# Allegro board CHIP_PRO_v1_0.brd
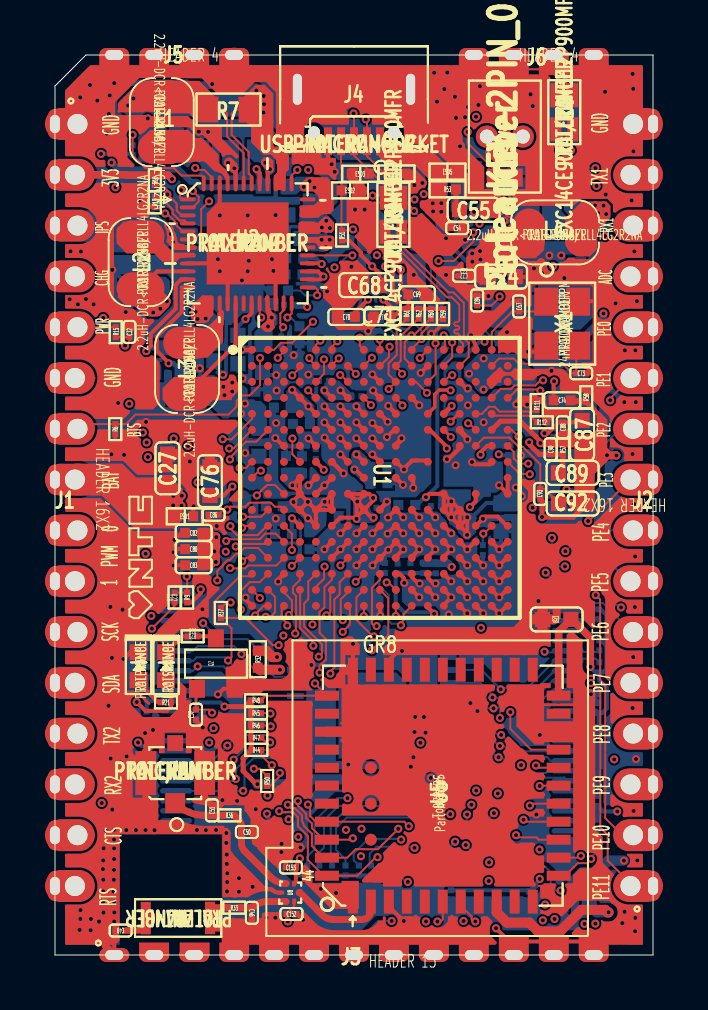
[diagram p0: board, top side]
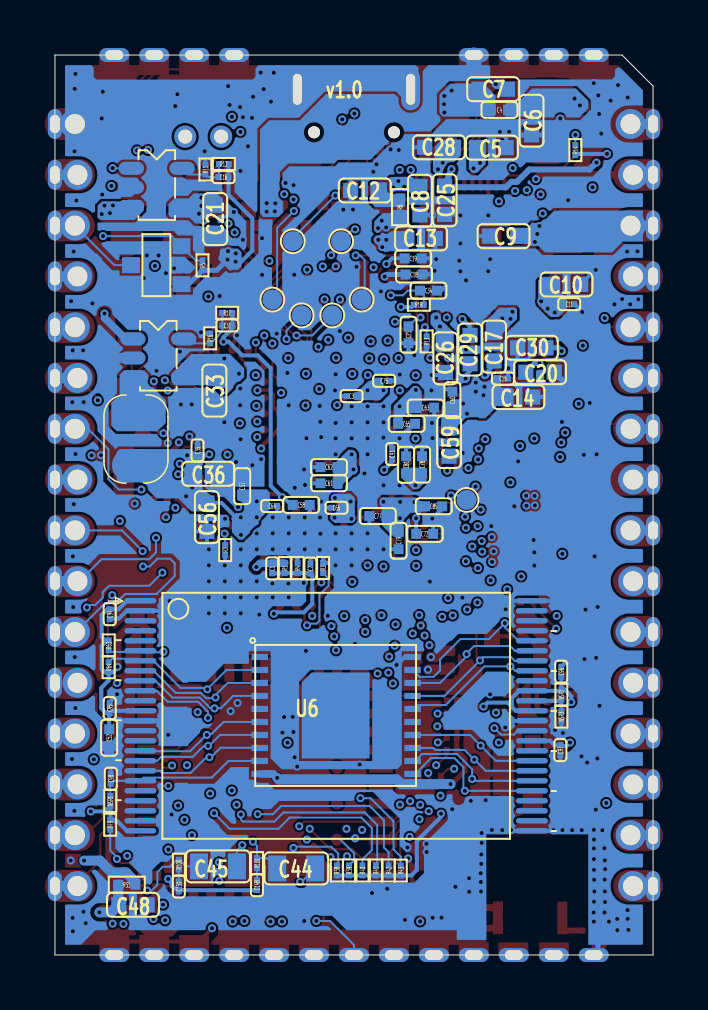
[diagram p1: board, bottom side, seen from below]

Outline 29.94 x 45 mm; copper layers: TOP, ART02, ART03, ART04, ART05, BOTTOM. Coordinates in mm from the lower left corner of the outline.
Outline path: 0,43.45 1.55,45 29.94,45 29.94,0 0,0 0,43.45

## Design rules (mm)
net group DP1: nets DM0 DP0
net group DP2: nets DM1 DP1
net group DRAM-VCC: nets DRAM-VCC SVREF

## Placement (name value [footprint] x y rotation side)
ANT1  NC/ANT  [WIFI-ANT-SD73412-011H1_3A]  6.02 9.09 0 top
ANT2  ANT  [WIFI-1206]  6.17 1.85 180 top
C1  104  [C0201]  19.07 19.33 270 bottom
C2  104  [C0201]  17.15 19.32 90 bottom
C3  104  [C0201]  15.09 27.94 180 bottom
C4  1uF  [C0402]  7.69 42.26 0 bottom
C5  4.7uF  [C0603]  8.06 40.37 180 bottom
C6  4.7uF  [C0603]  6.08 41.71 270 bottom
C7  4.7uF  [C0603]  8 43.29 180 bottom
C8  10uF  [C0603]  11.67 37.71 90 bottom
C9  10uF  [C0603]  7.48 35.94 0 bottom
C10  10uF  [C0603]  4.33 33.53 180 bottom
C11  102  [C0201]  4.2 32.54 180 bottom
C12  10uF  [C0603]  14.43 38.23 0 bottom
C13  10uF  [C0603]  11.61 35.83 180 bottom
C14  10uF  [C0603]  6.74 27.9 180 bottom
C15  102  [C0201]  7.51 28.82 180 bottom
C16  47pF  [C0201]  21.5 38.89 0 bottom
C17  10uF  [C0603]  7.96 30.42 270 bottom
C18  1uF  [C0402]  11.96 34.03 180 bottom
C19  1uF  [C0402]  12.01 34.83 0 bottom
C20  4.7uF  [C0603]  5.66 29.14 180 bottom
C21  4.7uF  [C0603]  21.92 36.8 270 bottom
C22  104  [C0201]  20.48 33.96 180 top
C23  1uF  [C0402]  12.24 31.01 90 bottom
C24  4.7uF  [C0603]  22.33 33.91 0 top
C25  4.7uF  [C0603]  10.43 37.74 90 bottom
C26  4.7uF  [C0603]  10.39 29.83 270 bottom
C27  4.7uF  [C0603]  5.63 24.34 270 top
C28  10uF  [C0603]  10.72 40.39 0 bottom
C29  4.7uF  [C0603]  9.16 30.27 270 bottom
C30  4.7uF  [C0603]  6.07 30.36 180 bottom
C31  47pF  [C0201]  21.31 31.48 0 bottom
C32  104  [C0201]  3.73 31.15 270 top
C33  4.7uF  [C0603]  21.96 28.22 270 bottom
C34  1uF  [C0402]  11.24 33.22 0 bottom
C35  104  [C0201]  22.8 25.23 90 bottom
C36  4.7uF  [C0603]  22.27 24.06 180 bottom
C37  104  [C0201]  7.06 12.02 90 top
C44  22uF  [C0805]  17.86 4.33 180 bottom
C45  22uF  [C0805]  21.78 4.43 180 bottom
C46  NC  [C0201]  9.86 2.11 270 top
C48  10uF  [C0603]  26.03 2.51 0 bottom
C49  8P  [C0201]  3.29 1.22 180 top
C50  NC  [C0201]  9.61 6.15 0 top
C51  NC  [C0201]  7.86 7.23 90 top
C52  1uF  [C0402]  27.23 10.86 90 bottom
C53  4.7uF  [C0603]  25.12 16.78 180 top
C54  104  [C0201]  20.13 36.35 180 top
C55  4.7uF  [C0603]  20.96 37.26 180 top
C56  4.7uF  [C0603]  22.33 21.89 90 bottom
C57  1uF  [C0402]  20.57 23.44 270 bottom
C58  1uF  [C0402]  17.61 22.5 0 bottom
C59  10uF  [C0603]  10.21 25.65 270 bottom
C60  1uF  [C0402]  10.04 27.74 90 bottom
C61  1uF  [C0402]  16.22 23.59 0 bottom
C62  1uF  [C0402]  16.22 24.39 0 bottom
C63  1uF  [C0402]  11.38 27.37 180 bottom
C64  104  [C0201]  19.07 22.45 0 bottom
C65  1uF  [C0402]  12.33 26.56 180 bottom
C66  104  [C0201]  15.85 22.36 180 bottom
C67  18pF-1%  [C0201]  23.24 32.43 270 top
C68  10uF  [C0603]  15.53 33.49 180 top
C69  1uF  [C0402]  18.12 33.04 180 top
C70  1uF  [C0402]  14.59 31.9 0 top
C71  1uF  [C0402]  16.38 31.89 0 top
C72  1uF  [C0402]  11.43 21.06 0 bottom
C73  18pF-1%  [C0201]  26.34 29.09 180 top
C74  1uF  [C0402]  25.39 27.74 180 top
C75  104  [C0201]  13.46 28.71 0 bottom
C76  10uF  [C0603]  7.76 23.69 90 top
C77  1uF  [C0402]  13.78 21.95 0 bottom
C78  1uF  [C0402]  11.56 24.52 90 bottom
C79  1uF  [C0402]  12.74 20.71 270 bottom
C80  1uF  [C0402]  6.94 20.29 180 top
C81  1uF  [C0402]  12.36 24.51 90 bottom
C82  1uF  [C0402]  6.94 21.11 180 top
C83  1uF  [C0402]  6.94 19.49 180 top
C84  102  [C0201]  21.13 32.73 270 top
C85  1uF  [C0402]  10.98 22.44 180 bottom
C86  104  [C0201]  7.94 22.01 0 top
C87  10uF  [C0603]  26.39 26.02 90 top
C88  104  [C0201]  25.43 26.39 90 top
C89  4.7uF  [C0603]  25.91 24.1 180 top
C90  104  [C0201]  24.81 25.29 270 top
C91  104  [C0201]  13.06 25.05 270 bottom
C92  10uF  [C0603]  25.92 22.57 180 top
C93  104  [C0201]  24.29 23.05 90 top
C94  104  [C0201]  27.2 17.04 90 bottom
C95  104  [C0201]  27.2 12.34 270 bottom
C96  104  [C0201]  4.6 14.17 270 bottom
C97  104  [C0201]  4.64 10.24 90 bottom
C98  104  [C0201]  27.14 8.82 270 bottom
C148  104  [C0201]  19.83 3.49 270 bottom
C151  104  [C0201]  23.74 3.42 270 bottom
C152  102  [C0201]  11.84 2.05 180 top
C153  104  [C0201]  11.81 4.38 0 top
D1  STAT  [D0603]  5.56 14.44 90 top
D2  PWR  [D0603]  4.18 14.45 90 top
ESD1  NC/AU0511P1  [ESD0402]  6.5 21.94 0 top
ESD2  NC/AU0511P1  [ESD0402]  14.77 38.23 0 top
ESD3  NC/AU0561BP  [ESD0402]  15.28 39.06 180 top
ESD4  NC/AU0561BP  [ESD0402]  17.1 39.08 0 top
ESD5  NC/AU0511P1  [ESD0402]  19.65 39.17 0 top
J1  HEADER 16X2  [STAMPVIA16]  0 22.5 0 top
J2  HEADER 16X2  [STAMPVIA16]  29.94 22.5 180 top
J3  HEADER 13  [STAMPVIA13]  14.97 0 0 top
J4  USB-MACRO-SOCKET  [USB-MIC-A01SB141BH2_4A]  14.97 45.44 0 top
J5  HEADER 4  [STAMPVIA4]  5.97 45 0 top
J6  HEADER 4  [STAMPVIA4]  23.97 45 0 top
L1  2.2uH-DCR<0.1R-1.5A/ELL4LG2R2NA  [L3518]  5.34 41.64 270 top
L2  2.2uH-DCR<0.1R-1.5A/ELL4LG2R2NA  [L3518]  4.29 34.64 90 top
L3  2.2uH-DCR<0.1R-1.5A/ELL4LG2R2NA  [L3518]  6.62 29.3 90 top
L4  2.2uH-DCR<0.1R-1.5A/ELL4LG2R2NA  [L3518]  25.03 36.13 0 top
L5  2.2uH-DCR<0.1R-1.5A/ELL4LG2R2NA  [L3518]  25.88 25.8 90 bottom
L9  EXC14CE900U/ICMF112P900MFR  [L0805X2]  16.94 37.01 90 top
L10  EXC14CE900U/ICMF112P900MFR  [L0805X2]  25.5 42.14 90 top
NSR1  10K  [R0201]  27.17 7.7 90 bottom
NSR2  NC/NC/0R  [R0201]  4.59 13.02 270 bottom
NSR3  NC/NC/0R  [R0201]  4.59 11.92 270 bottom
Q1  BSN20  [SOT-23]  24.86 34.49 0 bottom
Q2  MMBT3904  [SOT-23]  8.06 14.56 90 top
R1  2K-1%  [R0201]  18.44 19.34 90 bottom
R2  240R-1%  [R0201]  21.42 20.25 90 bottom
R3  240R-1%  [R0201]  16.52 19.35 270 bottom
R4  2K-1%  [R0201]  17.79 19.34 270 bottom
R5  10K  [R0201]  22.55 34.48 90 bottom
R6  NC/0R  [R0201]  3.02 26.3 90 top
R7  0R03  [R0805]  8.69 42.27 180 top
R8  1R  [R0402]  12.67 37.39 270 bottom
R9  10K  [R0201]  6.62 17.87 270 top
R10  10K  [R0201]  5 38.74 90 top
R11  100K-1%  [R0201]  22.41 39.27 270 bottom
R12  442K-1%  [R0201]  21.49 39.55 180 bottom
R13  200K-1%  [R0201]  11.33 30.68 90 bottom
R14  47K  [R0201]  3.89 40.24 270 bottom
R15  1K  [R0201]  3.04 31.14 90 top
R16  100K-1%  [R0201]  22.17 30.83 270 bottom
R17  150K-1%  [R0201]  21.32 32.11 180 bottom
R18  47K  [R0201]  11.73 32.51 0 bottom
R19  2K  [R0201]  5 37.64 270 top
R20  1K  [R0201]  6.89 15.93 0 top
R21  1K  [R0201]  5.56 12.63 0 top
R22  2K2  [R0201]  5.99 17.87 90 top
R31  NC/0R  [R0402]  26.35 3.52 180 bottom
R32  0R  [R0402]  10.16 14.79 90 top
R33  0R  [R0201]  8.98 2.37 180 top
R36  0R  [R0201]  8.73 6.98 0 top
R37  NC/0R  [R0201]  8.31 17.1 90 top
R38  33K  [R0201]  15.83 4.23 90 bottom
R39  33K  [R0201]  15.22 4.23 90 bottom
R40  NC  [R0201]  14.55 4.23 90 bottom
R41  33K  [R0201]  13.87 4.23 90 bottom
R42  33K  [R0201]  13.24 4.23 90 bottom
R43  33K  [R0201]  12.63 4.22 90 bottom
R44  NC/10K  [R0201]  10.08 10.25 0 top
R45  NC/10K  [R0201]  10.07 12.1 0 top
R46  10K  [R0201]  10.07 11.48 0 top
R47  10K  [R0201]  10.08 10.86 0 top
R48  100K  [R0201]  10.07 12.73 180 top
R49  100K  [R0201]  27.17 6.51 90 bottom
R50  NC/0R  [R0201]  10.62 8.7 90 top
R51  10K  [R0201]  14.37 35.97 270 top
R53  1R  [R0402]  19.65 38.29 180 top
R57  200K-1%  [R0201]  25.43 25.27 270 top
R58  0R  [R0201]  26.59 27.89 270 top
R59  2K2  [R0201]  19.43 32.05 270 top
R60  2K2  [R0201]  18.82 32.05 270 top
R61  2K2  [R0201]  17.6 32.07 270 top
R62  2K2  [R0201]  18.21 32.06 270 top
R63  NC/10K  [R0201]  27.25 15.48 270 bottom
R64  10K  [R0201]  27.25 14.39 90 bottom
R100  24R  [R0201]  23.74 4.52 270 bottom
R101  24R  [R0201]  19.83 4.59 270 bottom
R111  NC  [R0201]  24.12 27.49 90 top
R112  NC  [R0201]  24.37 26.64 180 top
SW2  KEY-2PIN_0  [SW_4P_TC3061B]  22.52 40.92 90 top
TP0  FEL  [TP40_SMD]  9.34 22.75 180 bottom
TP1  ID  [TP40_SMD]  15.61 35.69 180 bottom
TP2  D+  [TP40_SMD]  18.03 35.69 180 bottom
TP3  D-  [TP40_SMD]  19.06 32.77 180 bottom
TP4  SDA  [TP40_SMD]  17.59 31.98 180 bottom
TP5  SCK  [TP40_SMD]  16.06 31.98 180 bottom
TP6  DC3-SET  [TP40_SMD]  14.59 32.77 180 bottom
U1  GR8  [BGA252P80B1400_1400]  14.86 23.96 0 top
U2  AXP209  [QFN49_0_4H0_8A]  9.65 35.58 0 top
U3  LP3220SAB5F\SY8088  [SOT23_5H14A]  24.84 38.38 180 bottom
U4  LP3220SAB5F/SY8088  [SOT23_5H14A]  24.77 29.85 180 bottom
U5  8723BS  [QFN44-AP6476-12X12H1_6A]  19.41 8.47 90 top
U6  NAND FLASH X8  [QFN20P65B805_705H90]  15.89 11.98 180 bottom
U7  NC/NAND FLASH X8  [TSOP-48H1_2A]  15.86 11.96 270 bottom
U8  RDASW282/XMSS1R6G0PA-001  [RFSW6B105_105H40]  11.78 3.12 270 top
X1  24M-20pF-10PPM  [CRYSTAL-4P-3225-H1A]  25.39 31.57 90 top

## Library data of the parts
ANT1 = ANT_4: User Part Number: PRAT NUMBER; Tolerance: TOLERANCE
ANT2 = ANT_2: Tolerance: TOLERANCE; User Part Number: PRAT NUMBER
C1 = CAP_0: signal model: DEFAULT_RESISTOR_475OHM_2_1
C2 = CAP_0: signal model: DEFAULT_RESISTOR_104OHM_2_1
C3-C10 C12-C14 C16-C32 C44-C46 C48-C53 C56-C81 C83 C85-C98 C148 C151-C153 = CAPACITOR_0
C11 C15 = CAPACITOR_1
C33-C36 C82 C84 = CAPACITOR_0: signal model: DEFAULT_RESISTOR_224OHM_2_1
C37 = CAPACITOR_0: room: MODEM
C54 C55 = CAPACITOR
D1 = LED_0: User Part Number: PRAT NUMBER; Tolerance: TOLERANCE; room: MODEM
D2 = LED_0: User Part Number: PRAT NUMBER; Tolerance: TOLERANCE
ESD1-ESD5 = 1_1.5KE100A
J1 J2 = HEADER 16X2_0
J3 = HEADER 13
J4 = USB_MINI_SOCKET_2: User Part Number: PRAT NUMBER; Tolerance: TOLERANCE
J5 J6 = HEADER 4
L1-L3 = INDUCTOR_1: Tolerance: TOLERANCE; User Part Number: PRAT NUMBER
L4 L5 = INDUCTOR_0: Tolerance: TOLERANCE; User Part Number: PRAT NUMBER
L9 L10 = R-PACK4_0: Tolerance: TOLERANCE; User Part Number: PRAT NUMBER
NSR1 NSR2 R3 R6-R10 R13-R15 R18 R19 R21 R31-R33 R36-R51 R53 R57-R64 = R
NSR3 = R: signal model: DEFAULT_RESISTOR_10000OHM_2_1
Q1 = NMOS_xp151_SOT23
Q2 = NPN: room: MODEM
R1 = R1 0805: signal model: DEFAULT_RESISTOR_10000OHM_2_1
R2 = R: signal model: DEFAULT_RESISTOR_15OHM_2_1
R4 = R1 0805
R5 = R1_0805: room: DRAM
R11 R12 R16 R17 R100 R101 = ?_0
R20 R22 = RESISTOR: room: MODEM
R111 R112 = RESISTOR_0
SW2 = KEY-2PIN_0: Tolerance: Toleance; User Part Number: Part number
TP0-TP6 = T_POINT_R: User Part Number: PRAT NUMBER; Tolerance: TOLERANCE
U1 = GR8_BGA252: User Part Number: pn
U2 = AW1612_0: User Part Number: PRAT NUMBER; Tolerance: TOLERANCE
U3 U4 = RT9293B_0: User Part Number: PRAT NUMBER; Tolerance: TOLERANCE
U5 = AP6493_4: Tolerance: Toleance; User Part Number: Part number
U6 = NAND_QFN20_1
U7 = NAND_FLASH_X8: User Part Number: PRAT NUMBER; Tolerance: TOLERANCE
U8 = SP2T
X1 = CRYSTAL-4_3: User Part Number: PRAT NUMBER; Tolerance: TOLERANCE

## Footprints (pads in the part's own frame, mm; a bottom-side part is the same pattern mirrored in y, then rotated)
BGA252P80B1400_1400
  round 0.4 smd: A1(-5,6.3) A2(-4.2,6.3) A3(-3.4,6.3) A5(-1.8,6.3) A6(-1,6.3) A8(0.6,6.3) A9(1.4,6.3) A11(3,6.3) A12(3.8,6.3) A13(4.6,6.3) A14(5.4,6.3) A15(6.2,6.3) A16(7,6.3) A17(7.8,6.3) B1(-5,5.5) B2(-4.2,5.5) B3(-3.4,5.5) B4(-2.6,5.5) B5(-1.8,5.5) B6(-1,5.5) B7(-0.2,5.5) B8(0.6,5.5) B9(1.4,5.5) B10(2.2,5.5) B11(3,5.5) B12(3.8,5.5) B13(4.6,5.5) B14(5.4,5.5) B15(6.2,5.5) B16(7,5.5) B17(7.8,5.5) C1(-5,4.7) C2(-4.2,4.7) C3(-3.4,4.7) C4(-2.6,4.7) C5(-1.8,4.7) C6(-1,4.7) C7(-0.2,4.7) C8(0.6,4.7) C9(1.4,4.7) C10(2.2,4.7) C11(3,4.7) C12(3.8,4.7) C13(4.6,4.7) C14(5.4,4.7) C15(6.2,4.7) C16(7,4.7) C17(7.8,4.7) D2(-4.2,3.9) D3(-3.4,3.9) D4(-2.6,3.9) D5(-1.8,3.9) D6(-1,3.9) D7(-0.2,3.9) D8(0.6,3.9) D9(1.4,3.9) D10(2.2,3.9) D11(3,3.9) D13(4.6,3.9) D14(5.4,3.9) D15(6.2,3.9) D16(7,3.9) D17(7.8,3.9) E1(-5,3.1) E2(-4.2,3.1) E3(-3.4,3.1) E4(-2.6,3.1) E5(-1.8,3.1) E6(-1,3.1) E7(-0.2,3.1) E8(0.6,3.1) E9(1.4,3.1) E10(2.2,3.1) E12(3.8,3.1) E13(4.6,3.1) E14(5.4,3.1) E15(6.2,3.1) E16(7,3.1) F1(-5,2.3) F2(-4.2,2.3) F3(-3.4,2.3) F4(-2.6,2.3) F5(-1.8,2.3) F6(-1,2.3) F7(-0.2,2.3) F8(0.6,2.3) F9(1.4,2.3) F10(2.2,2.3) F12(3.8,2.3) F13(4.6,2.3) F14(5.4,2.3) F15(6.2,2.3) F16(7,2.3) F17(7.8,2.3) G2(-4.2,1.5) G3(-3.4,1.5) G4(-2.6,1.5) G5(-1.8,1.5) G6(-1,1.5) G7(-0.2,1.5) G8(0.6,1.5) G9(1.4,1.5) G10(2.2,1.5) G14(5.4,1.5) G15(6.2,1.5) G16(7,1.5) G17(7.8,1.5) H1(-5,0.7) H2(-4.2,0.7) H3(-3.4,0.7) H4(-2.6,0.7) H5(-1.8,0.7) H6(-1,0.7) H7(-0.2,0.7) H8(0.6,0.7) H9(1.4,0.7) H10(2.2,0.7) H12(3.8,0.7) H16(7,0.7) H17(7.8,0.7) J1(-5,-0.1) J2(-4.2,-0.1) J3(-3.4,-0.1) J4(-2.6,-0.1) J5(-1.8,-0.1) J6(-1,-0.1) J8(0.6,-0.1) J10(2.2,-0.1) J11(3,-0.1) J17(7.8,-0.1) K2(-4.2,-0.9) K3(-3.4,-0.9) K4(-2.6,-0.9) K5(-1.8,-0.9) K6(-1,-0.9) K7(-0.2,-0.9) K8(0.6,-0.9) K13(4.6,-0.9) K15(6.2,-0.9) K17(7.8,-0.9) L1(-5,-1.7) L2(-4.2,-1.7) L3(-3.4,-1.7) L4(-2.6,-1.7) L5(-1.8,-1.7) L6(-1,-1.7) L8(0.6,-1.7) L9(1.4,-1.7) L10(2.2,-1.7) L11(3,-1.7) L12(3.8,-1.7) L13(4.6,-1.7) L14(5.4,-1.7) M1(-5,-2.5) M2(-4.2,-2.5) M3(-3.4,-2.5) M4(-2.6,-2.5) M5(-1.8,-2.5) M6(-1,-2.5) M7(-0.2,-2.5) M8(0.6,-2.5) M9(1.4,-2.5) M10(2.2,-2.5) M11(3,-2.5) M12(3.8,-2.5) M13(4.6,-2.5) M14(5.4,-2.5) M15(6.2,-2.5) M16(7,-2.5) M17(7.8,-2.5) N2(-4.2,-3.3) N3(-3.4,-3.3) N4(-2.6,-3.3) N5(-1.8,-3.3) N6(-1,-3.3) N7(-0.2,-3.3) N8(0.6,-3.3) N9(1.4,-3.3) N10(2.2,-3.3) N11(3,-3.3) N12(3.8,-3.3) N13(4.6,-3.3) N14(5.4,-3.3) N15(6.2,-3.3) N16(7,-3.3) N17(7.8,-3.3) P1(-5,-4.1) P2(-4.2,-4.1) P3(-3.4,-4.1) P4(-2.6,-4.1) P5(-1.8,-4.1) P6(-1,-4.1) P7(-0.2,-4.1) P8(0.6,-4.1) P9(1.4,-4.1) P10(2.2,-4.1) P11(3,-4.1) P12(3.8,-4.1) P13(4.6,-4.1) P14(5.4,-4.1) P15(6.2,-4.1) P16(7,-4.1) P17(7.8,-4.1) R1(-5,-4.9) R2(-4.2,-4.9) R3(-3.4,-4.9) R4(-2.6,-4.9) R5(-1.8,-4.9) R6(-1,-4.9) R7(-0.2,-4.9) R8(0.6,-4.9) R9(1.4,-4.9) R10(2.2,-4.9) R11(3,-4.9) R12(3.8,-4.9) R13(4.6,-4.9) R14(5.4,-4.9) R15(6.2,-4.9) R16(7,-4.9) R17(7.8,-4.9) T1(-5,-5.7) T2(-4.2,-5.7) T3(-3.4,-5.7) T4(-2.6,-5.7) T5(-1.8,-5.7) T6(-1,-5.7) T7(-0.2,-5.7) T8(0.6,-5.7) T9(1.4,-5.7) T10(2.2,-5.7) T11(3,-5.7) T12(3.8,-5.7) T13(4.6,-5.7) T14(5.4,-5.7) T15(6.2,-5.7) T16(7,-5.7) T17(7.8,-5.7) U1(-5,-6.5) U2(-4.2,-6.5) U3(-3.4,-6.5) U5(-1.8,-6.5) U7(-0.2,-6.5) U8(0.6,-6.5) U9(1.4,-6.5) U10(2.2,-6.5) U11(3,-6.5) U12(3.8,-6.5) U13(4.6,-6.5) U14(5.4,-6.5) U15(6.2,-6.5) U16(7,-6.5) U17(7.8,-6.5)
C0201
  rect 0.3x0.3 smd: 1(-0.25,0) 2(0.25,0)
C0402
  rect 0.5x0.5 smd: 1(-0.425,0) 2(0.425,0)
C0603
  rect 0.76x0.76 smd: 1(-0.71,0) 2(0.71,0)
C0805
  rect 0.9x1.3 smd: 1(-0.95,0) 2(0.95,0)
CRYSTAL-4P-3225-H1A
  rect 1.4x1.199 smd: 1(1.1,0.8) 2(-1.1,0.8) 3(-1.1,-0.8) 4(1.1,-0.8)
D0603
  rect 0.8x0.899 smd: 1(-0.7,0) 2(0.7,0)
ESD0402
  rect 0.5x0.5 smd: 1(-0.425,0) 2(0.425,0)
L0805X2
  rect 1.2x0.55 smd: 1(-0.85,0.425) 2(-0.85,-0.425) 3(0.85,0.425) 4(0.85,-0.425)
L3518
  oval 1.6x2.4 smd: 1(-1.3,0) 2(1.3,0)
QFN20P65B805_705H90
  rect 0.83x0.31 smd: 1(-3.8,2.925) 2(-3.8,2.275) 3(-3.8,1.625) 4(-3.8,0.975) 5(-3.8,0.325) 6(-3.8,-0.325) 7(-3.8,-0.975) 8(-3.8,-1.625) 9(-3.8,-2.275) 10(-3.8,-2.925) 11(3.85,-2.925) 12(3.85,-2.275) 13(3.85,-1.625) 14(3.85,-0.975) 15(3.85,-0.325) 16(3.85,0.325) 17(3.85,0.975) 18(3.85,1.625) 19(3.85,2.275) 20(3.85,2.925)
  custom 3.4x4.3 smd: 21(0,0)
QFN44-AP6476-12X12H1_6A
  rect 1.199x0.5 smd: 1(-5.799,4.501) 2(-5.799,3.599) 3(-5.799,2.7) 4(-5.799,1.801) 5(-5.799,0.899) 6(-5.799,0) 7(-5.799,-0.899) 8(-5.799,-1.801) 9(-5.799,-2.7) 10(-5.799,-3.599) 11(-5.799,-4.501) 23(5.799,-4.501) 24(5.799,-3.599) 25(5.799,-2.7) 26(5.799,-1.801) 27(5.799,-0.899) 28(5.799,0) 29(5.799,0.899) 30(5.799,1.801) 31(5.799,2.7) 32(5.799,3.599) 33(5.799,4.501)
  rect 0.5x1.199 smd: 12(-4.501,-5.799) 13(-3.599,-5.799) 14(-2.7,-5.799) 15(-1.801,-5.799) 16(-0.899,-5.799) 17(0,-5.799) 18(0.899,-5.799) 19(1.801,-5.799) 20(2.7,-5.799) 21(3.599,-5.799) 22(4.501,-5.799) 34(4.501,5.799) 35(3.599,5.799) 36(2.7,5.799) 37(1.801,5.799) 38(0.899,5.799) 39(0,5.799) 40(-0.899,5.799) 41(-1.801,5.799) 42(-2.7,5.799) 43(-3.599,5.799) 44(-4.501,5.799)
  round 0.599 smd: 45(-2.7,3.599) 46(-0.899,3.599) 47(0.899,3.599)
QFN49_0_4H0_8A
  oval 0.8x0.2 smd: 1(-3,2.2) 2(-3,1.8) 3(-3,1.4) 4(-3,1) 5(-3,0.6) 6(-3,0.2) 7(-3,-0.2) 8(-3,-0.6) 9(-3,-1) 10(-3,-1.4) 11(-3,-1.8) 12(-3,-2.2) 25(3,-2.2) 26(3,-1.8) 27(3,-1.4) 28(3,-1) 29(3,-0.6) 30(3,-0.2) 31(3,0.2) 32(3,0.6) 33(3,1) 34(3,1.4) 35(3,1.8) 36(3,2.2)
  oval 0.2x0.8 smd: 13(-2.2,-3) 14(-1.8,-3) 15(-1.4,-3) 16(-1,-3) 17(-0.6,-3) 18(-0.2,-3) 19(0.2,-3) 20(0.6,-3) 21(1,-3) 22(1.4,-3) 23(1.8,-3) 24(2.2,-3) 37(2.2,3) 38(1.8,3) 39(1.4,3) 40(1,3) 41(0.6,3) 42(0.2,3) 43(-0.2,3) 44(-0.6,3) 45(-1,3) 46(-1.4,3) 47(-1.8,3) 48(-2.2,3)
  custom 4.1x4.1 smd: 49(0,0)
R0201
  rect 0.3x0.3 smd: 1(-0.25,0) 2(0.25,0)
R0402
  rect 0.5x0.5 smd: 1(-0.425,0) 2(0.425,0)
R0805
  rect 0.9x1.3 smd: 1(-0.95,0) 2(0.95,0)
RFSW6B105_105H40
  custom 0.3x0.2 smd: 1(-0.45,0.2)
  rect 0.3x0.2 smd: 2(-0.45,-0.2) 4(0.45,-0.2) 5(0.45,0.2)
  rect 0.2x0.3 smd: 3(0,-0.45) 6(0,0.45)
SOT23_5H14A
  oval 1.27x0.66 smd: 1(-1.27,0.953) 2(-1.27,0) 3(-1.27,-0.953) 4(1.27,-0.953) 5(1.27,0.953)
SOT-23
  rect 0.9x0.8 smd: 1(-1.254,0.95) 2(-1.254,-0.95) 3(1.27,0)
STAMPVIA4
  rect 1.5x1 smd: (-3,-0.5) (-1,-0.5) (1,-0.5) (3,-0.5)
  oval 1.5x0.7 hole 0.9x0.5: 1(-3,0) 2(-1,0) 3(1,0) 4(3,0)
STAMPVIA13
  rect 1.5x0.644 smd: (-10.008,0.305) (-7.976,0.305) (-5.994,0.305)
  rect 1.5x1 smd: (-4,0.5) (-2,0.5) (0,0.5) (2,0.5) (4,0.5) (6,0.5) (8,0.5) (10,0.5) (12,0.5)
  oval 1.5x0.7 hole 0.9x0.5: 1(-12,0) 2(-10,0) 3(-8,0) 4(-6,0) 5(-4,0) 6(-2,0) 7(0,0) 8(2,0) 9(4,0) 10(6,0) 11(8,0) 12(10,0) 13(12,0)
STAMPVIA16
  oval 2.5x1.6 smd: (0.75,19.05) (0.75,16.51) (0.75,13.97) (0.75,11.43) (0.75,8.89) (0.75,6.35) (0.75,3.81) (0.75,1.27) (0.75,-1.27) (0.75,-3.81) (0.75,-6.35) (0.75,-8.89) (0.75,-11.43) (0.75,-13.97) (0.75,-16.51) (0.75,-19.05)
  oval 0.7x1.5 hole 0.5x0.9: 1(0,19.05) 2(0,16.51) 3(0,13.97) 4(0,11.43) 5(0,8.89) 6(0,6.35) 7(0,3.81) 8(0,1.27) 9(0,-1.27) 10(0,-3.81) 11(0,-6.35) 12(0,-8.89) 13(0,-11.43) 14(0,-13.97) 15(0,-16.51) 16(0,-19.05)
  round 1.5 hole 1: 17(1.127,19.05) 18(1,16.51) 19(1.127,13.97) 20(1,11.43) 21(1.127,8.89) 22(1,6.35) 23(1.127,3.81) 24(1,1.27) 25(1.127,-1.27) 26(1,-3.81) 27(1.127,-6.35) 28(1,-8.89) 29(1.127,-11.43) 30(1,-13.97) 31(1.127,-16.51) 32(1,-19.05)
SW_4P_TC3061B
  round 1.11 hole 0.701: (0,0.9) (0,-0.9)
  rect 0.9x1.8 smd: 1(-2.05,0)
  rect 0.9x1.7 smd: 2(2.05,0)
TP40_SMD
  round 1.001 smd: 1(0,0)
TSOP-48H1_2A
  oval 0.28x1.6 smd: 1(-5.75,-9.8) 2(-5.25,-9.8) 3(-4.75,-9.8) 4(-4.25,-9.8) 5(-3.75,-9.8) 6(-3.25,-9.8) 7(-2.75,-9.8) 8(-2.25,-9.8) 9(-1.75,-9.8) 10(-1.25,-9.8) 11(-0.75,-9.8) 12(-0.25,-9.8) 13(0.25,-9.8) 14(0.75,-9.8) 15(1.25,-9.8) 16(1.75,-9.8) 17(2.25,-9.8) 18(2.75,-9.8) 19(3.25,-9.8) 20(3.75,-9.8) 21(4.25,-9.8) 22(4.75,-9.8) 23(5.25,-9.8) 24(5.75,-9.8) 25(5.75,9.8) 26(5.25,9.8) 27(4.75,9.8) 28(4.25,9.8) 29(3.75,9.8) 30(3.25,9.8) 31(2.75,9.8) 32(2.25,9.8) 33(1.75,9.8) 34(1.25,9.8) 35(0.75,9.8) 36(0.25,9.8) 37(-0.25,9.8) 38(-0.75,9.8) 39(-1.25,9.8) 40(-1.75,9.8) 41(-2.25,9.8) 42(-2.75,9.8) 43(-3.25,9.8) 44(-3.75,9.8) 45(-4.25,9.8) 46(-4.75,9.8) 47(-5.25,9.8) 48(-5.75,9.8)
USB-MIC-A01SB141BH2_4A
  round 0.6 hole 0.6 unplated: (-2,-4.3) (2,-4.3)
  rect 0.4x1.4 smd: 1(1.3,-4.75) 2(0.65,-4.75) 3(0,-4.75) 4(-0.65,-4.75) 5(-1.3,-4.75)
  oval 0.95x2.1 hole 0.45x1.55: 8(-2.835,-2.15) 9(2.835,-2.15)
  rect 1.4x1 smd: 10(-3.2,-4.4) 11(3.2,-4.4)
  rect 1.9x1.9 smd: 12(-1.2,-2.15) 13(1.2,-2.15)
WIFI-1206
  rect 0.508x0.6 smd: 1(-1.6,0.508) 2(-1.6,-0.508)
  rect 0.508x1.626 smd: 3(1.626,0)
WIFI-ANT-SD73412-011H1_3A
  rect 1x1 smd: 1(0,-1.5)
  rect 0.8x0.8 smd: 2(0,1.5)
  rect 1.05x2.2 smd: 3(1.475,0) 4(-1.475,0)

## Nets
AGND: C74.1 C87.1 C88.1 C89.1 C90.1 C92.1 C93.1 C148.2 C151.2 J3.10 R57.1 R58.2 U1.F16(AGND)
AVCC: C20.1 U1.F12(AVCC) U2.12(LDO2) U4.1(EN)
GND: ANT1.3 ANT1.4 ANT2.1 C2.2 C3.1 C5.2 C6.2 C7.2 C8.1 C9.2 C10.2 C11.2 C12.2 C13.2 C14.2 C15.2 C17.2 C18.2 C19.1 C20.2 C21.2 C22.2 C23.1 C24.2 C25.1 C26.2 C27.1 C28.2 C29.2 C30.1 C32.1 C33.2 C34.1 C35.2 C36.2 C37.1 C46.2 C48.1 C49.2 C50.2 C51.2 C52.1 C53.2 C54.1 C55.1 C56.1 C57.1 C58.1 C59.2 C60.2 C61.2 C62.2 C63.2 C64.1 C65.2 C66.1 C67.1 C68.2 C69.1 C70.1 C71.1 C72.1 C73.1 C75.1 C76.2 C77.2 C78.2 C79.2 C80.2 C81.2 C82.2 C83.2 C84.1 C85.2 C86.1 C91.1 C94.1 C95.1 C96.1 C97.1 C98.1 C152.1 C153.1 D2.2(CATHODE) ESD1.2(CATHODE) ESD2.2(CATHODE) ESD3.2(CATHODE) ESD4.2(CATHODE) ESD5.2(CATHODE) J1.1 J1.6 J1.17 J1.22 J2.16 J2.32 J3.1 J4.5(GND) J4.8(SHIELD3) J4.9(SHIELD4) J4.10(SHIELD5) J4.11(SHIELD6) J4.12 J4.13 J5.1 J6.1 J6.4 NSR3.2 Q2.2(E) R2.1 R3.1 R4.1 R6.1 R11.1 R13.1 R16.1 R19.2 R58.1 R111.2 R112.1 SW2.2 U1.A1(GND0) U1.A15(GND1) U1.A17(GND2) U1.B12(GND3) U1.C9(GND4) U1.C14(GND5) U1.C16(GND6) U1.D9(GND7) U1.D11(GND8) U1.E6(GND9) U1.E7(GND10) U1.E8(GND11) U1.E9(GND12) U1.E10(GND13) U1.F6(GND15) U1.F7(GND16) U1.F8(GND17) U1.F9(GND18) U1.F10(GND19) U1.F14(GND14) U1.G3(GND20) U1.G5(GND21) U1.G6(GND22) U1.G7(GND23) U1.G8(GND24) U1.G9(GND25) U1.G10(GND26) U1.G14(GND27) U1.H6(GND28) U1.H7(GND29) U1.H9(GND30) U1.H10(GND31) U1.H12(GND32) U1.H16(GND33) U1.J5(GND34) U1.J6(GND35) U1.J10(GND36) U1.J11(GND37) U1.J17(GND38) U1.K5(GND39) U1.K15(GND40) U1.K17(GND41) U1.L9(GND42) U1.L10(GND43) U1.L11(GND44) U1.L12(GND45) U1.M7(GND46) U1.M8(GND47) U1.M9(GND48) U1.M10(GND49) U1.M11(GND50) U1.M12(GND51) U1.M13(GND52) U1.M15(GND53) U1.M17(GND73) U1.N6(GND72) U1.N7(GND71) U1.N8(GND70) U1.N9(GND69) U1.N10(GND68) U1.N11(GND67) U1.N12(GND66) U1.N13(GND65) U1.N14(GND64) U1.N15(GND63) U1.N16(GND62) U1.N17(GND61) U1.P6(GND60) U1.P8(GND59) U1.P9(GND58) U1.P10(GND57) U1.P11(GND56) U1.P12(GND55) U1.P13(GND54) U1.P14(GND100) U1.P15(GND99) U1.P16(GND98) U1.P17(GND97) U1.R3(GND96) U1.R10(GND95) U1.R11(GND94) U1.R12(GND93) U1.R13(GND92) U1.R14(GND91) U1.R15(GND90) U1.R16(GND89) U1.R17(GND88) U1.T11(GND87) U1.T12(GND86) U1.T13(GND85) U1.T14(GND84) U1.T15(GND83) U1.T16(GND82) U1.T17(GND81) U1.U1(GND80) U1.U9(GND79) U1.U13(GND78) U1.U14(GND77) U1.U15(GND76) U1.U16(GND75) U1.U17(GND74) U2.9(PGND2) U2.16(PGND3) U2.22(AGND) U2.46(PGND1) U2.49(THERMAL) U3.2(GND) U4.2(GND) U5.1(GND1) U5.3(GND2) U5.20(GND3) U5.31(GND4) U5.33(GND5) U5.36(GND6) U6.20(VSS) U7.2(NC2) U7.13(VSS1) U7.23(NC8) U7.25(NC10) U7.36(VSS2) U7.48(NC22) U8.3(GND) X1.2(GND#2) X1.4(GND#4)
VBAT-EXT: C4.1 C6.1 L1.1 R7.2 R31.2 U2.43(CHSENSE)
VCC-1V8: C29.1 U2.19(GPIO0/LDO)
VCC-WIFI: C48.2 R31.1 R32.1 U5.9(VBAT)
VINT: C18.1 U2.26(VINT) U2.27(LDO1SET)
ANT-SELET: C152.2 U1.T5(PB17/TWI2-SCK) U8.5(VCTL)
AP-UART-CTS: R45.2 U1.U10(PG11/EINT11) U5.41(UART_RTS_N)
AP-UART-RTS: R44.2 U1.R8(PG12/EINT12) U5.44(UART_CTS_N)
AP-UART-RX: R46.2 U1.P7(PG10/EINT10) U5.42(UART_TXD)
AP-UART-TX: R47.2 U1.R9(PG9/EINT9) U5.43(UART_RXD)
AP-WAKE-BT: R10.1 U2.3(GPIO3) U5.6(BT_WAKE)
BAT: C4.2 C7.1 C27.2 ESD1.1(ANODE) J1.8 J1.24 R7.1 U2.38(BAT1) U2.39(BAT2) U2.42(BATSENSE)
BT-RST-N: R48.1 U1.A12(PB4/IR-RX/EINT18) U5.34(BT_RST_N)
BT-WAKE-AP: R37.2 U1.N3(PG0/EINT0)
CHG-IN: J1.4 J1.20 R8.2 U2.32(ACIN1) U2.33(ACIN2)
COREVDD: C14.1 C15.1 C59.1 C60.1 C61.1 C62.1 C63.1 C65.1 L3.1 U1.D4(VDD-SYS0) U1.E5(VDD-SYS1) U1.H8(VDD-DLL) U1.J8(VDD-SYS2) U2.17(DCDC3)
CPUVDD: C10.1 C11.1 C76.1 C77.1 C78.1 C79.1 C80.1 C81.1 C82.1 C83.1 C85.1 L2.1 U1.J4(VDD-CPU0) U1.K4(VDD-CPU1) U1.K6(VDD-CPU2) U1.L4(VDD-CPU3) U1.L5(VDD-CPU4) U1.L6(VDD-CPU5) U1.M5(VDD-CPU6) U2.10(DCDC2)
CSI-D0: J2.8 J2.24 U1.A5(PE4/CSI-D0/SDC2-D0)
CSI-D1: J2.7 J2.23 U1.B6(PE5/CSI-D1/SDC2-D1)
CSI-D2: J2.6 J2.22 U1.B4(PE6/CSI-D2/SDC2-D2)
CSI-D3: J2.5 J2.21 U1.C7(PE7/CSI-D3/SDC2-D3)
CSI-D4: J2.4 J2.20 U1.A3(PE8/CSI-D4/SDC2-CMD)
CSI-D5: J2.3 J2.19 U1.D5(PE9/CSI-D5/SDC2-CLK)
CSI-D6: J2.2 J2.18 U1.A2(PE10/CSI-D6/UART1-TX)
CSI-D7: J2.1 J2.17 U1.C5(PE11/CSI-D7/UART1-RX)
CSI-HSYNC: J2.10 J2.26 U1.A6(PE2/CSI-HSYNC/SPI2-MOSI)
CSI-MCLK: J2.11 J2.27 U1.B7(PE1/CSI-MCLK/SPI2-CLK/EINT15)
CSI-PCLK: J2.12 J2.28 U1.A8(PE0/CSI-PCLK/SPI2-CS0/EINT14)
CSI-VSYNC: J2.9 J2.25 U1.B5(PE3/CSI-VSYNC/SPI2-MISO)
DM0: L9.2(R2) U1.B14(USB0-DM)
DM1: L10.1(R1) U1.B13(USB1-DM)
DP0: L9.1(R1) U1.A14(USB0-DP)
DP1: L10.2(R2) U1.A13(USB1-DP)
DRAM-VCC: C1.1 C31.1 C35.1 C36.1 C56.2 C57.2 C58.2 C64.2 C66.2 L5.1 R1.2 R17.2 U1.K7(VCC-DRAM0) U1.K8(VCC-DRAM1) U1.K13(VCC-DRAM2) U1.L8(VCC-DRAM3) U1.L13(VCC-DRAM4) U1.L14(VCC-DRAM5) U1.M6(VCC-DRAM6) U1.M14(VCC-DRAM7)
EXTEN: U2.20(EXTEN) U3.1(EN)
FEL: SW2.1 TP0.1(TP) U1.K3(UBOOT)
HP-L: C44.2 J3.2
HP-R: C45.2 J3.4
HPBP: C92.2 C93.2 U1.G15(HPBP)
HPCOM: J3.3 U1.G17(HPCOM) U1.H17(HPCOMFB)
HPL: C44.1 R101.1 U1.F15(HPL)
HPR: C45.1 R100.1 U1.F17(HPR)
HPVCC: C3.2 C16.1 C22.1 C24.1 C52.2 C53.1 C68.1 C69.2 C70.2 C71.2 C72.2 C75.2 C91.2 C94.2 C95.2 C96.2 C97.2 C153.2 D1.1(ANODE) J1.2 J1.18 L4.1 NSR1.1 NSR2.1 Q1.1(GATE) R5.1 R9.2 R10.2 R12.2 R18.2 R21.2 R38.1 R39.1 R40.1 R41.1 R42.1 R43.1 R44.1 R45.1 R46.1 R47.1 R48.2 R49.2 R51.2 R59.1 R60.1 R61.1 R62.1 R63.1 R64.1 U1.D6(VCC-IO0) U1.D7(VCC-USB) U1.G16(VCC-HP) U1.H5(VCC-IO1) U1.M4(VCC-IO2) U5.22(VDDIO) U6.10(VCC) U7.1(RES#) U7.12(VCC1) U7.24(NC9) U7.34(NC15) U7.37(VCC2) U7.39(NC17) U8.1(VDD)
I2S-BCLK: J3.6 U1.U7(PB6/I2S-BCLK/EINT20)
I2S-DI: J3.9 U1.T9(PB9/I2S-DI/SPDIF-DI/EINT23)
I2S-DO: J3.8 U1.T7(PB8/I2S-DO/EINT22)
I2S-LRCK: J3.7 U1.U8(PB7/I2S-LRCK/EINT21)
I2S-MCLK: J3.5 U1.T6(PB5/I2S-MCLK/EINT19)
IPSOUT: C5.1 C8.2 C9.1 C17.1 C21.1 C26.1 C28.1 C33.1 J1.3 J1.19 U2.7(VIN2) U2.13(LDO24IN) U2.14(VIN3) U2.21(APS) U2.34(PS1) U2.35(PS2) U2.40(LDO3IN) U2.44(VIN1) U3.4(IN) U4.4(IN)
LDO3: C25.2 C30.2 R32.2 U2.11(LDO4) U2.41(LDO3)
LED-STATUS: R9.1 R22.2 U2.5(GPIO2)
LRADC0: C84.2 J2.13 J2.29 U1.C13(LRADC0)
MICIN1: J3.11 U1.D17(MICIN1)
MICIN2: J3.12 U1.D16(MICIN2)
NALE: U1.R7(PC1/NALE/SPI0-MISO) U6.7(ALE) U7.17(ALE)
NCE0-N: U1.T4(PC4/NCE0) U6.4(CE#) U7.9(CE1#)
NCE1-N: U1.M3(PC3/NCE1/SPI0-CS0) U7.10(CE2#)
NCLE: U1.R5(PC2/NCLE/SPI0-CLK) U6.6(CLE) U7.16(CLE)
ND0: U1.U2(PC8/NDQ0) U6.11(I/O1) U7.29(IO0)
ND1: U1.R2(PC9/NDQ1) U6.12(I/O2) U7.30(IO1)
ND2: U1.T2(PC10/NDQ2) U6.13(I/O3) U7.31(IO2)
ND3: U1.T1(PC11/NDQ3) U6.14(I/O4) U7.32(IO3)
ND4: U1.N2(PC12/NDQ4) U6.16(I/O5) U7.41(IO4)
ND5: U1.R1(PC13/NDQ5) U6.17(I/O6) U7.42(IO5)
ND6: U1.P1(PC14/NDQ6) U6.18(I/O7) U7.43(IO6)
ND7: U1.P2(PC15/NDQ7) U6.19(I/O8) U7.44(IO7)
NDQS: U1.P3(PC19/NDQS) U7.35(NC16)
NMI-N: R14.1 U1.M2(NMI) U2.48(IRQ)
NRB0-N: R64.2 U1.U3(PC6/NRB0) U6.2(RY/BY#) U7.7(RB1#)
NRB1-N: R63.2 U1.T3(PC7/NRB1) U7.6(RB2#)
NRE-N: U1.R4(PC5/NRE) U6.3(RE#) U7.8(RE#)
NWE-N: U1.R6(PC0/NWE/SPI0-MOSI) U6.8(WE#) U7.18(WE#)
NWP-N: C98.2 NSR1.2 U6.9(WP#) U7.19(WP#)
OSC24MI: C67.2 U1.A16(X24MIN) X1.1(XIN)
OSC24MO: C73.2 U1.B16(X24MOUT) X1.3(XOUT)
PG4: Q1.2(SOURCE) R5.2 U1.H1(PG4/SDC1-CLK/UART1-RX/EINT4)
POWER-ON: J1.5 J1.21 R15.2
PWM0: J1.9 J1.25 U1.C12(PB2/PWM0/EINT16)
PWM1: J1.10 J1.26 U1.T10(PG13/PWM1/EINT13)
RESET-N: C34.2 C86.2 R18.1 U1.L3(RESET) U2.25(PWROK)
RTCVDD: C19.2 R14.2 U2.28(LDO1)
SVREF: C1.2 C2.1 R1.1 R4.2 U1.U12(SVREF)
SZQ: R3.2 U1.U11(SZQ)
SZQ1: R2.2 U1.M16(SZQ1)
TS: J1.7 J1.23 R6.2 U2.37(TS)
TWI0-SCK: R60.2 TP5.1(TP) U1.B11(PB0/TWI0-SCK) U2.2(SCK)
TWI0-SDA: R59.2 TP4.1(TP) U1.A11(PB1/TWI0-SDA) U2.1(SDA)
TWI1-SCK: J1.11 J1.27 R62.2 U1.B10(PB15/TWI1-SCK)
TWI1-SDA: J1.12 J1.28 R61.2 U1.C10(PB16/TWI1-SDA)
UART1-RX: J2.14 J2.30 Q1.3(DRAIN)
UART1-TX: J2.15 J2.31 U1.J1(PG3/SDC1-CMD/UART1-TX/EINT3)
UART2-CTX: J1.15 J1.31 U1.E1(PD4/LCD-D4/UART2-CTS)
UART2-RTX: J1.16 J1.32 U1.F2(PD5/LCD-D5/UART2-RTS)
UART2-RX: J1.14 J1.30 U1.L2(PD3/LCD-D3/UART2-RX)
UART2-TX: J1.13 J1.29 U1.F1(PD2/LCD-D2/UART2-TX)
USB0-DRV: U1.P4(PB11/SPI2-CS0/JTAG-MS0/EINT25) U2.6(N_VBUSEN)
USB0-IDDET: ESD2.1(ANODE) J4.4(ID) R51.1 TP1.1(TP) U1.M1(PG2/EINT2)
USBVBUS: C13.1 C54.2 ESD5.1(ANODE) J4.1(VBUS) J5.4 R53.2 U2.31(VBUS)
VMIC: J3.13 U1.E14(VMIC)
VPS: NSR2.2 NSR3.1 U7.38(VSS3)
VRA1: C74.2 U1.E12(VRA1)
VRA2: C89.2 C90.2 R57.2 U1.E13(VRA2)
VRP: C87.2 C88.2 U1.F13(VRP)
WL-PMU-EN: R49.1 U1.T8(PB10/SPDIF-DO/EINT24) U5.12(WL_REG_ON)
WL-SDIO-CLK: R40.2 U1.A9(PF2/SDC0-CLK/UART0-TX) U5.17(SDIO_DATA_CLK)
WL-SDIO-CMD: R41.2 U1.C11(PF3/SDC0-CMD/JTAG-DO1) U5.16(SDIO_DATA_CMD)
WL-SDIO-D0: R39.2 U1.B9(PF1/SDC0-D0/JTAG-DI1) U5.18(SDIO_DATA_0)
WL-SDIO-D1: R38.2 U1.D8(PF0/SDC0-D1/JTAG-MS1) U5.19(SDIO_DATA_1)
WL-SDIO-D2: R43.2 U1.D10(PF5/SDC0-D2/JTAG-CK1) U5.14(SDIO_DATA_2)
WL-SDIO-D3: R42.2 U1.B8(PF4/SDC0-D3/UART0-RX) U5.15(SDIO_DATA_3)
WL-WAKE-AP: R50.2 U1.H4(PB3/IR-TX/EINT17)
N17860849: U5.2(WL_BT_ANT) U8.6(RFC)
N20314568: L3.2 U2.15(LX3)
N20314637: L1.2 U2.45(LX1)
N20314996: R13.2 U2.23(BIAS)
N20315137: L2.2 U2.8(LX2)
N20749703: R19.1 U2.4(N_OE)
N20819937: C23.2 U2.24(VREF)
N20828828: TP6.1(TP) U2.29(DC3SET)
N21782572: ESD4.1(ANODE) J4.2(D-) J5.2 L9.4(R4) TP3.1(TP)
N21782578: ESD3.1(ANODE) J4.3(D+) J5.3 L9.3(R3) TP2.1(TP)
N21789427: C16.2 R11.2 R12.1 U3.5(FB)
N21789469: L4.2 U3.3(LX)
N21789937: C31.2 R16.2 R17.1 U4.5(FB)
N21789999: L5.2 U4.3(LX)
N21824958: C37.2 Q2.1(B) R22.1
N21824970: Q2.3(C) R20.2
N21824972: D1.2(CATHODE) R20.1
N21932331: C32.2 R15.1 U2.47(PWRON)
N21933125: R37.1 U5.7(BT_HOST_WAKE)
N21935584: R50.1 U5.13(WL_HOST_WAKE)
N22175741: C12.1 R8.1
N22221685: C151.1 R100.2
N22221687: C148.1 R101.2
N22238071: R112.2 U1.E16(LINEINL)
N22238078: R111.1 U1.E15(LINEINR)
N22312123: ANT1.1 C51.1 R36.1
N22312143: C50.1 R36.2 U8.2(RF1)
N22312433: C46.1 R33.1 U8.4(RF2)
N22312455: ANT2.2 R33.2
N22319021: ANT2.3 C49.1
N22328405: J6.2 L10.3(R3)
N22328408: J6.3 L10.4(R4)
N203145090: D2.1(ANODE) R21.1
N217827101: C55.2 R53.1

Pads without a net: ANT1 2; U1 B1 B2 B3 B15 B17 C1 C2 C3 C4 C6 C8 C15 C17 D2 D3 D13 D14 D15 E2 E3 E4 F3 F4 F5 G2 G4 H2 H3 J2 J3 K2 L1 N4 N5 P5 U5; U2 18 30 36; U5 4 5 8 10 11 21 23 24 25 26 27 28 29 30 32 35 37 38 39 40 45 46 47; U6 1 5 15 21; U7 3 4 5 11 14 15 20 21 22 26 27 28 33 40 45 46 47

## Via types
v1: diameter 0.406, hole 0.203, TOP to BOTTOM, 655 vias

## Routing (per net, layer and track width the routed paths; a pad name or vN(x,y) marks a point on that pad's centre or on a via; arc(x,y) is an arc through that point)
AGND: length 96.7
  TOP w0.203: v1(28.11,24.98) 28.09,25 27.76,25 27.44,25.32 27.44,26.79 R58.2 26.5,27.74 C74.1
  TOP w0.254: R57.1 24.82,25.52 C90.1 24.36,25.54 v1(24.3,25.6) 24.3,25.68 24.07,25.91 24.07,25.91 23.29,26.69 22.3,26.69 U1.F16 ; R57.1 25.43,26.14 C88.1 ; R57.1 26.17,25.52 C87.1 26.54,25.31 27.44,26.21 ; C92.1 25.95,21.89 v1(24.38,21.89) 24.38,22.71 C93.1
  TOP w0.381: C89.1 26.75,24.1 v1(27.63,24.99) 27.64,24.98 v1(28.11,24.98)
  TOP w0.508: C87.1 26.62,25.07 C89.1 26.62,22.58 C92.1 v1(25.95,22.57)
  ART03 w0.203: v1(26.51,1.56) 26.56,1.6 26.56,1.62 26.62,1.68 26.62,1.75 27.24,2.37 27.24,5.31 26.88,5.67 26.88,11.63 27.69,12.44 27.69,15.12 27.49,15.32 27.48,15.32 26.89,15.91 26.89,17.15 27.5,17.76 27.5,22.54 25.8,24.24 25.8,25.01 27.3,26.51 27.3,28.98 26.34,29.94 24.67,29.94 23.69,28.96 23.69,28.05 24.04,27.69 24.04,27.69 24.09,27.64 24.09,25.85 24.18,25.77 24.18,25.75 24.3,25.64 24.3,25.6 v1(24.3,25.6) 24.3,25.59 24.34,25.59 24.87,25.06 24.87,23.43 25.73,22.57 ; 25.73,22.57 v1(25.95,22.57) ; 25.73,22.57 26.09,22.22 26.09,21.59 26.77,20.91 26.77,18.9 26.13,18.26 26.13,6.14 26.04,6.05 26.04,6.02 25.51,5.49 25.51,4.45 25.99,3.97 25.99,2.68 25.51,2.2 25.51,1.72 24.95,1.17 24.03,1.17 23.82,1.37 23.82,1.81 v1(24.53,2.52) 24.48,2.52 24.16,2.85 24.16,3.69 v1(24.27,3.8)
  ART04 w0.203: 24.36,3.21 24.27,3.3 v1(24.27,3.8)
  ART04 w0.635: J3.10 20.97,0.58 21.23,0.84
  ART05 w0.203: v1(26.51,1.56) 26.54,1.56 26.62,1.48 26.91,1.48 27.01,1.57 v1(27.05,1.57)
  BOTTOM w0.203: C148.2 23.67,3.24 C151.2 23.88,3.32 23.97,3.32 24.09,3.44 24.09,3.58 24.27,3.76 v1(24.27,3.8)
AVCC: length 29.8
  TOP w0.203: U1.F12 18.76,26.26 19.62,25.41 v1(19.62,25.33) ; v1(5.69,29.59) 5.69,29.62 5.1,30.2 5.1,30.92 6.35,32.17 6.35,33.18 6.55,33.38 U2.12
  ART03 w0.254: v1(5.69,29.59) 6.66,28.62 v1(6.66,25.45)
  ART04 w0.381: v1(24.94,34.45) 26.04,34.45 27.46,33.03 v1(27.46,32.08)
  ART05 w0.381: v1(24.94,34.45) 24.96,34.43 24.96,30.15 22,27.19 22,26.41 20.87,25.29 19.73,25.29 19.71,25.32 19.63,25.32 v1(19.62,25.33)
  BOTTOM w0.254: v1(5.69,29.59) 5.92,29.59 C20.1
  BOTTOM w0.381: v1(27.46,32.08) 27.46,31.86 26.4,30.8 U4.1
GND: length 370.6
  TOP w0.102: v1(26.83,13.04) 26.42,13.04 26.39,13.01 ; R111.2 23.87,27.74 23.86,27.75
  TOP w0.152: 15.23,38.23 15.23,37.9 15.45,37.69 ; 24.87,29.19 24.28,29.19 24.13,29.05 22.38,29.05 22.36,29.06 ; v1(20.83,30.99) 20.83,31.07 20.78,31.12 20.78,32.66 19.57,33.87 v1(19.57,34.01) 19.25,34.01 18.82,34.44 18.82,34.9 19.57,35.65 v1(19.57,35.84) ; 23.66,27.6 23.64,27.58 v1(23.64,27.52) ; v1(15.5,37.27) 15.58,37.35 ; 15.58,37.35 15.58,37.55 ; 15.58,37.35 15.58,35.72 15.92,35.38 16.27,35.38 16.86,34.8 17.38,34.8 17.96,34.21 v1(17.96,34.01) 17.96,33.56 18.48,33.04 C69.1 18.92,32.66 18.94,32.66 18.97,32.63 19.04,32.63 19.05,32.63 19.65,32.63 19.76,32.52 19.76,31.57 19.65,31.47 19.32,31.47 19.13,31.27 19.11,31.27 18.91,31.07 v1(18.84,31.07)
  TOP w0.203: v1(6.75,24.68) 7.03,24.4 C76.2 ; 17.28,25.67 U1.G10 17.06,25.55 17.28,25.76 17.28,25.67 ; 17.28,25.67 17.35,25.74 v1(17.35,25.84) ; 19.69,24.79 19.72,24.79 20.26,25.34 20.26,25.36 ; 19.69,24.79 20.26,25.36 ; 19.69,24.79 v1(19.62,24.79) ; U1.E8 v1(15.09,27.43) ; v1(23.1,27.53) 23.1,27.52 v1(23.64,27.52) 23.86,27.75 24.28,27.75 24.5,27.52 24.5,26.9 24.62,26.79 R112.1 ; v1(15.5,37.27) 15.5,37.63 15.45,37.69 15.03,37.27 v1(15.02,37.27) ; U2.46 8.25,36.98 v1(8.25,36.98) v1(9.65,35.58) ; v1(15.92,28.23) 15.94,28.22 15.94,28.18 U1.D9 ; R19.2 4.84,37.39 4.49,37.74 v1(4.25,37.74) ; 19.14,41.03 19.24,41.03 20.07,41.86 v1(20.07,41.86) ; 19.14,41.03 19.14,41.58 ; 19.14,41.03 19.14,40.95 ; 22.5,29.06 22.27,29.06 U1.C16 ; 20.26,25.36 U1.G14 ; 24.97,29.21 24.88,29.21 ; 24.88,29.21 v1(24.86,29.21) ; 24.88,29.21 24.87,29.19 25.4,29.19 25.92,28.67 26.8,28.67 26.59,28.47 R58.1 ; U1.H7 v1(14.29,25.03) ; U1.N7 v1(14.29,20.28) U1.P6 ; U1.G9 v1(15.89,25.83) ; 7.05,16.97 7.06,16.97 v1(7.38,17.28) ; v1(13.85,39.54) 13.67,39.71 J4.5 13.46,40.68 13.15,40.38 13.15,40.3 13.14,40.28 v1(13.14,40.28) ; U1.R3 11.17,18.77 v1(11.17,18.67) ; U1.U17 22.61,17.46 v1(22.24,17.08) U1.U16 ; U1.L12 v1(19.04,21.88) ; v1(18.24,27.48) 17.87,27.86 U1.D11 ; U1.H12 18.6,24.73 17.88,24.73 17.47,24.32 v1(17.47,24.28) 17.09,24.66 U1.H10 ; 27.01,32.69 27.95,32.69 v1(28.06,32.58) ; 27.01,32.69 27.03,32.67 27.03,29.61 27.01,29.58 27.05,29.54 C73.1 27.54,29.09 ; 27.01,32.69 26.22,32.69 X1.4 ; 12.27,40.07 11.77,40.57 J4.10 ; v1(21.7,32.95) 21.16,32.95 C84.1 20.81,32.98 20.52,33.26 ; U1.M12 v1(19.04,21.08) ; v1(22.23,23.49) 22.66,23.06 U1.K17 U1.J17 ; U1.F9 16.23,26.26 15.91,26.59 ; Q2.2 9.01,13.94 ; Q2.2 8.44,13.31 v1(8.16,13.03) ; Q2.2 9.59,13.31 ; v1(15.9,19.48) 15.9,19.49 16.26,19.86 U1.P9 16.28,19.86 v1(16.68,20.26) 17.06,20.64 U1.N10 v1(17.44,20.28) 17.06,19.91 U1.P10 ; ESD1.2 6.92,22.3 6.9,22.32 6.9,22.4 v1(6.94,22.44) ; C71.1 15.96,31.48 v1(15.68,31.2) ; C32.1 3.73,31.96 v1(3.54,32.15) ; U5.3 16.71,2.43 17.28,1.86 17.3,1.86 v1(17.46,1.7) ; U1.T13 v1(19.84,17.88) 19.46,17.51 U1.U13 ; U1.R13 v1(19.84,18.68) ; U1.M15 21.07,21.46 v1(21.42,21.81) 21.53,21.92 22.16,21.92 22.62,21.46 U1.M17 ; U1.H16 21.74,24.53 20.99,24.53 v1(20.88,24.65) ; U1.P13 19.46,19.91 v1(19.84,20.28) U1.N13 ; U1.A15 21.11,30.36 20.87,30.93 20.85,30.95 20.85,30.97 v1(20.83,30.99) 20.85,30.99 20.94,31.07 21.31,31.07 22.93,32.69 23.22,32.69 C67.1 ; v1(12.29,5.38) 12.29,5.31 12.31,5.3 ; U1.R15 v1(21.44,18.68) ; U2.22 11.05,34.18 11.03,34.2 10.95,34.2 v1(10.94,34.21) ; 22.59,43.82 22.59,43.63 22.5,43.54 22.5,42.86 ; U1.H9 v1(15.89,25.03) ; v1(17.94,23.36) 17.94,23.79 U1.J11 ; v1(10.94,34.21) 10.94,34.25 9.65,35.54 ; v1(10.94,34.21) 9.65,35.5 ; R6.1 3.02,25.23 v1(2.82,25.03) ; 19.16,40.89 19.02,41.03 ; C37.1 7.06,11.72 7.4,11.38 v1(7.4,11.37) ; v1(13.62,33.18) 13.66,33.18 14.16,32.68 C70.1 ; U1.A17 22.66,31.1 v1(22.63,31.14) ; U1.E7 v1(14.29,27.43) ; U5.33 14.91,15.57 v1(14.92,15.56) 14.91,15.56 14.91,15.49 ; 15.91,26.59 15.92,26.59 15.91,26.6 v1(15.89,26.6) 15.91,26.59 ; U1.T12 v1(19.04,17.88) ; U1.C14 20.6,28.32 v1(20.66,28.32) ; U5.31 16.71,14.74 17.18,15.21 v1(17.38,15.21) ; v1(14.07,3.1) 14.48,3.1 U5.1 ; v1(23.69,30.17) 24.29,30.17 X1.2 ; U1.N15 21.01,20.66 v1(20.64,20.28) U1.N14 ; U1.F7 v1(14.29,26.63) ; U1.P17 22.61,19.86 v1(22.24,19.48) U1.P16 ; U8.3 11.18,3.12 arc(11.02,3.15) 10.89,3.24 10.85,3.28 10.45,3.28 ; U1.N6 v1(13.49,20.28) ; v1(14.84,34.41) 14.82,34.4 C68.2 ; C86.1 7.69,21.81 8.06,21.45 v1(8.1,21.45) ; U1.R16 v1(22.24,18.68) 22.61,19.06 U1.R17 ; U1.P8 v1(15.09,19.48) ; U1.L11 v1(18.24,21.88) ; 19.14,41.58 19.14,41.93 19.6,42.39 19.6,42.57 19.85,42.82 19.93,42.82 v1(20.02,42.91) 20.03,42.92 ; 19.14,41.58 19.88,42.32 19.96,42.32 20.03,42.39 ; U1.M9 v1(15.89,21.08) ; U1.P12 18.66,19.91 v1(19.04,20.28) U1.N12 ; v1(5.94,19.47) 5.96,19.49 C83.2 ; U1.T11 v1(18.24,17.88) ; v1(17.48,18.6) 17.46,18.63 17.46,18.85 17.25,19.06 U1.R10 ; 9.65,35.5 v1(9.65,34.18) 9.65,34.04 9.39,33.78 9.39,33.73 v1(9.36,33.73) ; 9.65,35.5 9.65,35.54 ; 27.95,1.14 v1(28.4,1.59) 28.85,1.14 ; D2.2 3.78,15.15 v1(3.43,14.8) ; 2.97,0.02 2.97,0.67 2.92,0.72 ; U1.G7 v1(14.29,25.83) ; v1(20.66,39.2) 20.62,39.17 ESD5.2 ; v1(16.65,21.06) 16.65,21.08 17.03,21.46 U1.M10 v1(17.44,21.08) ; 9.39,30.26 9.38,30.27 v1(9.36,30.27) 9.37,30.26 9.39,30.26 ; 9.39,30.26 U1.A1 ; v1(11.03,25.84) 11.42,25.46 U1.G3 ; v1(16.62,25.89) 16.98,26.26 U1.F10 ; U1.P14 v1(20.64,19.48) ; 9.65,35.54 v1(9.65,35.58) ; U1.T16 v1(22.24,17.88) 22.61,18.26 U1.T17 ; U1.R11 17.86,18.9 18.19,18.57 v1(18.26,18.57) ; v1(14.68,9.52) 14.68,10.82 14.34,11.17 13.62,11.17 U5.36 ; U1.C9 v1(15.89,29.03) ; v1(9.65,35.58) 8.65,34.58 ; U1.N16 v1(22.24,20.28) 22.61,20.66 U1.N17 ; U1.K5 v1(13.49,23.48) U1.J6 ; v1(17.44,21.88) U1.L10 17.04,22.26 16.67,21.89 v1(16.67,21.87) ; C22.2 19.62,33.96 v1(19.57,34.01) ; U1.T15 v1(21.44,17.88) ; U1.K15 21.06,22.69 v1(20.77,22.4) ; C80.2 6.11,20.29 v1(5.94,20.13) ; v1(19.57,35.84) 20,35.84 20.38,36.23 C54.1 ; 6.57,21.11 C82.2 6.33,21.11 v1(5.98,20.75) ; U1.J5 v1(12.69,23.48) ; U1.R14 v1(20.64,18.68) ; C55.1 21.46,37.26 21.35,37.15 v1(20.98,37.15) ; U1.R12 18.66,18.86 18.95,18.58 v1(19.05,18.58) ; U1.U14 v1(20.64,17.08) ; U1.B12 18.38,29.17 18.38,29.17 v1(18.31,29.1) ; 8.65,34.58 U2.9 ; 8.65,34.58 U2.16 ; v1(24.27,11.01) 24.28,10.99 24.28,10.88 24.51,10.88 24.79,11.17 U5.20 ; U1.M7 v1(14.29,21.08) ; v1(16.29,16.96) 16.26,16.98 U1.U9 ; U1.G5 v1(12.69,25.83) ; v1(12.42,1.76) 12.12,2.05 C152.1 ; J1.22 1.93,28.85 ; C24.2 23.55,33.91 23.56,33.91 v1(23.98,34.33) ; U1.N9 v1(15.89,20.28) ; U1.U15 v1(21.44,17.08) ; U1.M11 v1(18.24,21.08) ; U1.G8 v1(15.09,25.83) ; 29.06,1.4 v1(29.06,1.86) ; U1.N11 v1(18.24,20.28) 17.86,19.91 U1.P11 ; U1.N8 v1(15.09,20.28) ; U1.T14 v1(20.64,17.88) ; U1.P15 v1(21.44,19.48) ; U1.M8 v1(15.09,21.08) ; U1.E6 v1(13.49,27.43) ; U1.M13 v1(19.84,21.08) ; U1.F8 v1(15.09,26.63) ; v1(9.54,17.87) 9.55,17.86 9.55,17.77 U1.U1 ; U1.F6 v1(13.49,26.63) ; 16.26,22.31 v1(16.62,22.67) 16.62,22.61 U1.L9 16.26,22.31 ; 17.06,27.08 v1(16.69,27.46) 16.69,27.44 U1.E10 17.06,27.08 ; U1.F14 20.26,26.17 v1(20.65,25.79) 20.65,25.87 U1.F14 ; 13.86,25.5 v1(13.49,25.87) 13.49,25.83 U1.G6 13.86,25.5 ; 18.29,38.49 v1(18.4,38.6) 17.94,39.06 17.93,39.06 17.93,38.53 17.97,38.49 v1(17.99,38.49) 18.29,38.49 ; 16.66,26.67 U1.E9 16.26,27.05 v1(16.66,26.66) 16.66,26.67 ; U1.H6 13.87,24.66 v1(14.45,24.08) 14.44,24.08 U1.H6 ; v1(17.42,23.5) U1.J10 v1(17.42,23.5)
  TOP w0.254: C50.2 9.86,6.04 10.05,5.85 ; C50.2 9.86,6.31 10.01,6.45 ; C50.2 10.21,6.15 10.22,6.16 ; v1(28.53,30.23) v1(29.05,30.23) ; C153.1 11.56,4.92 v1(11.34,5.15) ; v1(28.5,27.64) v1(29.07,27.64)
  TOP w0.305: v1(9.12,7.71) 9.63,7.71 ; 2.92,0.72 3.04,0.84 C49.2 3.04,1.6 v1(2.96,1.67)
  TOP w0.33: ANT2.1 8.61,1.34
  TOP w0.35: J3.1 2.97,0.02 2.55,0.44 arc(2.47,0.55) 2.45,0.69 ; 4.54,7.6 4.55,7.61 ANT1.4 ; v1(8.38,7.74) 8.38,7.66 8.21,7.48 C51.2 7.5,7.84 ANT1.3 ; 3.57,9.1 3.58,9.09 3.83,9.09 ; ANT1.4 3.83,9.09 ; ANT1.4 4.55,9.2 ; 3.83,9.09 v1(3.3,9.62) ; v1(3.59,9.93) 3.66,10.01 3.74,10.01 4.55,9.2 ; 7.06,10.42 7.5,9.98 ANT1.3 ; ANT1.3 8.39,9.09 ; 4.55,9.2 4.55,10.19 4.88,10.52 ; 9.63,7.71 v1(10.05,7.29) ; C46.2 9.86,1.43
  TOP w0.508: 15.87,43.28 J4.12 13.11,43.28 ; v1(12.73,40.25) 11.95,41.03 J4.10 11.77,41.92 11.77,41.92 ; v1(24.2,17.7) 24.41,17.5 C53.2 ; J1.17 J1.1 ; 19.14,41.03 19.16,40.89 19.87,40.38 20.26,40.45 v1(20.28,40.43) ; 14.48,14.26 U5.33 14.91,13.49 ; 16.17,42.16 J4.13 ; J4.13 J4.9 18.77,43.28 ; J4.13 16.01,43.28 ; 23.85,16.78 C53.2 ; C53.2 24.41,16.22 ; C53.2 24.96,16.78 ; 7.76,24.96 C76.2 8.32,24.4 ; 6.19,25.05 C27.1 5.63,24.49 ; J1.6 J1.22 ; 14.91,3.44 U5.1 14.48,2.67 ; 19.02,41.03 J4.11 18.17,42.04 18.17,42.04 ; U5.36 14.39,11.17 ; J2.32 J2.16 ; 12.14,42.06 J4.8 11.48,43.28
  ART02 w0.254: 2.85,0.7 2.85,0.12 J3.1
  ART02 w0.508: J1.22 J1.6 ; J1.17 J1.1 ; J2.32 J2.16
  ART02 w0.762: 26.97,44.01 26.97,44.01 J6.4 ; J5.1 v1(2.97,43.59) ; J6.1 20.97,43.97
  ART03 w0.102: v1(23.92,42.44) 23.92,41.87 24.24,41.54 24.24,40.5 23.74,40 22.64,40 v1(22.44,40.19) 22.25,40 21.27,40 20.99,40.27 19.41,40.27 19.22,40.08 19.22,39.27 19.7,38.79 19.7,35.96 v1(19.57,35.84)
  ART03 w0.152: 20.9,37.24 20.66,37.48 v1(20.66,39.2) ; 20.9,37.24 v1(20.98,37.15) ; 20.9,37.24 20.53,37.09 v1(20.53,35.76) 20.47,35.7 20.47,34.6 20.47,34.59 20.47,34.28 20.47,34.27 20.47,31.34 v1(20.83,30.99) ; v1(18.84,31.07) 18.84,31.16 19.57,31.89 v1(19.57,34.01) 19.64,34.08 19.64,35.77 v1(19.57,35.84)
  ART03 w0.254: J3.1 2.86,0.11 2.86,0.69
  ART03 w0.508: 18.77,43.28 19.43,43.28 ; 12.45,43.28 13.76,43.28
  ART04 w0.102: 18.04,30.43 18.5,30.43 ; v1(20.83,30.99) 20.48,31.33 19.1,31.33 v1(18.84,31.07) ; 17.47,31.34 18.15,31.34 18.15,31.34
  ART04 w0.254: 2.82,0.65 2.82,0.15 J3.1
  ART05 w0.254: J3.1 2.84,0.13 2.84,0.75
  ART05 w0.508: 11.48,43.28 J4.8 12.79,43.28 ; 17.8,42.06 J4.9 ; J4.9 17.15,43.28 ; J4.9 18.46,43.28 ; J1.17 1.13,42.48 ; J1.17 2.06,41.55 ; J1.17 1.13,40.62 ; J1.22 1,29.78 ; J1.22 1,27.92 ; J1.22 J1.6 ; J1.22 1.93,28.85 ; 28.01,41.55 J2.32 ; J2.32 28.94,42.48 ; J2.32 28.94,40.62
  BOTTOM w0.102: 10.08,28.28 10.04,28.25 C60.2 ; 7.01,40.97 6.98,41 6.88,41 ; 27.64,34.73 27.63,34.74 27.63,34.79 27.87,35.02 27.96,35.02 ; v1(22.44,40.19) 22.76,40.19 23.13,39.82 26.73,39.82 27.6,40.69 v1(27.6,41.83)
  BOTTOM w0.127: 27.14,9.54 27.33,9.36 27.57,9.36
  BOTTOM w0.203: C85.2 10.55,22.32 v1(11.05,21.82) 11.05,21.82 11.01,21.77 C72.1 ; C21.2 21.47,36.09 21.11,35.73 20.57,35.73 v1(20.53,35.76) ; v1(21.46,26.64) 22.05,26.64 22.8,25.89 C35.2 ; 7.35,6.21 7.15,6.21 ; 7.15,6.21 U7.25 5.2,6.21 4.8,6.6 4.8,7.81 ; 7.15,6.21 v1(7.11,6.25) ; v1(9.53,25.1) 9.69,24.94 C59.2 ; v1(27.57,38.02) 26.79,38.02 26.43,38.38 U3.2 ; C15.2 7.26,29.32 v1(7.25,29.34) 6.78,29.81 C30.1 ; v1(20.67,27.49) 20.65,27.5 20.65,28.32 v1(20.66,28.32) ; R2.1 21.42,19.5 v1(21.44,19.48) ; C56.1 23.02,21.18 23.02,21.19 ; C56.1 22.33,21.78 22.34,21.79 ; C56.1 22.33,20.38 v1(22.24,20.28) ; C61.2 17.33,23.59 v1(17.42,23.5) ; v1(4.51,11.1) 4.51,11.18 4.59,11.26 NSR3.2 ; v1(13.49,25.87) 13.06,25.43 C91.1 ; U7.23 24.41,6.71 24.1,7.02 v1(24.1,7.02) ; v1(11.09,28.23) 11.04,28.28 10.08,28.28 ; v1(15.92,28.23) 15.91,28.21 15.87,28.21 15.6,27.94 C3.1 ; v1(22.44,40.19) 22.44,40.13 22.41,40.09 R11.1 ; C66.1 16.42,22.36 16.62,22.56 v1(16.62,22.67) ; C11.2 3.94,32.54 v1(3.54,32.15) ; v1(2.87,34.26) 2.88,34.24 2.91,34.24 C10.2 ; v1(15.02,37.27) 15.14,37.39 15.14,37.83 ; v1(19.62,24.79) 19.92,24.49 v1(20.06,24.49) ; v1(15.5,37.27) 15.5,37.33 15.07,37.76 15.14,37.83 ; 4.36,27.9 4.24,28.01 3.58,28.01 v1(3.17,27.6) ; 4.36,27.9 C14.2 ; 4.36,27.9 4.39,27.93 ; 24.37,17.18 24.4,17.21 U7.2 26.35,17.21 26.74,16.82 27.17,16.82 C94.1 ; v1(9.65,36.98) 9.7,37.03 C25.1 ; v1(17.44,20.28) 17.15,20 C2.2 ; C5.2 7.35,40.84 v1(7.67,41.16) ; C95.1 27.2,12.66 26.89,12.96 26.89,12.98 v1(26.83,13.04) ; v1(14.29,21.08) 14.2,21.17 C77.2 ; 12.71,30.59 12.71,30.59 C23.1 ; 11.76,30.59 11.76,30.59 C23.1 ; C13.2 10.9,34.83 v1(10.86,34.79) 11.01,34.79 11.05,34.83 C19.1 ; 15.14,37.83 C12.2 15.14,38.96 15.07,39.02 ; v1(19.71,17.02) 19.7,17.03 19.53,17.03 19.53,17.44 ; C98.1 27.14,10.35 C52.1 26.67,10.99 26.67,11.61 ; v1(9.65,34.18) 10.61,33.22 C34.1 ; C23.1 12.24,30.23 12.03,30.02 11.97,30.02 v1(11.95,29.99) 11.92,29.97 11.62,29.97 11.33,30.26 R13.1 ; C65.2 11.96,26.56 v1(12.69,25.83) 12.36,25.51 C81.2 ; v1(16.68,20.26) 16.52,20.09 R3.1 16.02,19.6 v1(15.9,19.48) ; C33.2 22.31,27.16 22.85,27.16 23.05,27.36 23.05,27.46 23.1,27.5 v1(23.1,27.53) 23.1,27.52 v1(23.64,27.52) ; v1(7.4,11.37) 7.19,11.37 7.05,11.52 7.05,11.61 6.96,11.71 U7.36 ; v1(8.41,29.01) 8.41,29.05 7.96,29.5 C17.2 ; C64.1 18.82,22.11 v1(19.04,21.88) ; R4.1 17.79,19.84 v1(18.24,20.28) ; C58.1 17.19,22.13 v1(17.44,21.88) ; v1(9.39,28.83) 9.39,28.98 9.16,29.2 C29.2 ; U6.20 12.42,14.9 12.75,14.58 12.76,14.58 v1(12.84,14.5) ; C63.2 10.96,26.71 v1(11.07,26.6) ; C79.2 13.48,20.29 v1(13.49,20.28) ; 20.57,33.75 20.46,33.75 20.28,33.93 19.65,33.93 v1(19.57,34.01) ; C36.2 21.46,24.06 v1(20.88,24.65) 20.22,24.65 v1(20.06,24.49) ; v1(20.06,24.49) 20.57,23.98 C57.1 ; 3.84,9.75 4.06,9.75 4.29,9.52 4.58,9.52 4.64,9.58 C97.1 ; C62.2 17.35,24.39 v1(17.47,24.28) ; v1(22.63,31.14) 22.61,31.14 22.55,31.08 R16.1 ; v1(11.08,29) 10.52,29 C26.2 ; C96.1 4.36,14.65 3.62,14.65 3.47,14.8 v1(3.43,14.8) ; C28.2 12.6,40.39 v1(12.73,40.25) ; v1(10.94,34.21) 10.95,34.2 11.03,34.2 11.2,34.03 C18.2 ; 24.51,11.41 24.37,11.27 24.37,11.1 v1(24.27,11.01) ; C75.1 13.01,28.71 12.69,29.02 v1(12.68,29.02) ; v1(9.65,35.58) 9.28,35.94 C9.2 ; v1(11.03,25.84) 11.56,25.32 C78.2 ; 7.36,17.75 7.32,17.71 U7.48 5.02,17.71 4.93,17.79 ; v1(27.54,43.16) 27.94,43.56 ; C8.1 11.66,37 v1(11.04,37)
  BOTTOM w0.254: 5.17,41 5.17,41 C6.2 6.88,41 ; 25.89,1.69 25.32,2.25 C48.1 ; 27.35,30.12 28.35,30.12 28.45,30.22 28.51,30.22 v1(28.53,30.23) ; J3.1 2.76,0.21 2.76,0.83 ; 26.67,11.61 26.57,11.71 U7.13 24.8,11.71 24.51,11.41
  BOTTOM w0.305: 4.39,27.93 4.39,28.59 C20.2
  BOTTOM w0.35: v1(27.54,43.16) 27.7,43.16 27.94,43.4 27.94,43.56
  BOTTOM w0.381: v1(7.87,43.55) 7.82,43.49 7.47,43.49 7.29,43.31 C7.2
  BOTTOM w0.508: 27.35,30.12 27.08,29.85 U4.2 ; J2.32 J2.16 ; 21.56,23.5 C36.2 ; J1.17 J1.1 ; C33.2 22.52,27.51 ; C33.2 21.4,27.51 ; C33.2 21.96,26.95 ; 27.23,10.01 C52.1 ; C52.1 27.65,10.44 ; C52.1 26.8,10.44 ; 20.99,23.86 C57.1 20.14,23.86 ; J1.22 J1.6
  vias: v1(0.78,35.18) v1(0.74,32.79) v1(1.15,32.53) v1(1.27,42.88) v1(1.28,2.25) v1(1.27,1.81) v1(1.23,1.25) v1(1.3,35.17) v1(1.55,32.8) v1(1.75,43.5) v1(1.79,1.24) v1(1.8,1.8) v1(1.93,32.53) v1(2.12,42.72) v1(2.21,1.67) v1(2.44,5.34) v1(2.41,4.73) v1(2.4,4.29) v1(2.42,3.76) v1(2.41,3.18) v1(2.41,2.65) v1(2.43,2.13) v1(2.54,6.24) v1(2.59,41.07) v1(2.68,12.46) v1(2.74,42.98) v1(2.7,42.05) v1(2.77,17.4) v1(2.79,9.83) v1(2.85,14.85) v1(2.87,7.27) v1(2.93,19.93) v1(2.96,6.26) v1(2.96,5.77) v1(2.96,5.33) v1(2.96,4.8) v1(2.96,4.26) v1(2.95,3.76) v1(2.94,3.18) v1(2.96,2.66) v1(2.97,2.13) v1(3.38,17.27) v1(3.46,25.01) v1(3.57,6.24) v1(4.05,6.25) v1(4.56,26.66) v1(4.54,6.25) v1(4.65,41.83) v1(4.91,11.25) v1(4.99,6.24) v1(7.21,41.17) v1(7.55,6.25) v1(8.07,6.25) v1(8.16,34.79) v1(8.25,34.18) v1(8.58,6.1) v1(8.58,5.61) v1(8.6,5.02) v1(8.6,4.56) v1(8.63,4.09) v1(8.62,3.65) v1(8.61,3.18) v1(9.21,3.84) v1(9.21,3.16) v1(9.7,34.71) v1(9.9,3.41) v1(10.59,1.87) v1(11.03,1.86) v1(11.35,5.56) v1(13.31,3.31) v1(14,39.16) v1(17.81,9.42) v1(17.94,9.89) v1(18.04,11.91) v1(18,11.15) v1(18.47,11.9) v1(18.55,11.12) v1(18.99,44.11) v1(19.13,42.67) v1(19.49,43.29) v1(19.64,44.12) v1(20.53,41.89) v1(20.67,42.4) v1(20.8,12.6) v1(21.15,12.19) v1(21.27,43.44) v1(21.2,42.5) v1(23.81,43.04) v1(24.38,34.09) v1(24.75,34.98) v1(25.34,34.98) v1(25.5,33.85) v1(28.51,2.16) v1(28.87,37.73) v1(28.92,44.05) v1(28.95,43.31) v1(28.96,40.18) v1(28.91,25.05) v1(28.95,14.9) v1(28.91,12.35) v1(28.97,7.21) v1(29,35.17) v1(29,22.54) v1(29.04,19.93) v1(29.02,17.4) v1(29.09,9.8) v1(29.04,1.19) v1(29.13,32.69) v1(29.15,4.73)
VBAT-EXT: length 75
  TOP w0.102: R7.2 8.44,42.27 8.61,42.09 8.61,40.93 9.45,40.1 U2.43
  ART03 w0.508: v1(28.48,4.72) 27.56,5.64 27.56,9.35 v1(27.99,9.78)
  ART04 w0.508: 4.26,42.52 3.71,42.52 v1(3.66,42.48) ; 4.26,42.52 3.96,42.82 v1(3.93,42.82) ; 4.26,42.52 4.85,42.52 5.41,41.97 5.41,41.81 7.58,39.63 7.58,39.07 7.99,38.66 11.12,38.66 12.04,37.74 14.3,37.74 14.8,38.25 14.81,38.25 15.79,39.22 19.23,39.22 20.07,38.39 21.22,38.39 21.77,38.94 26.63,38.94 v1(27.11,38.45) ; v1(27.99,9.78) 27.67,9.78 25.31,12.15 25.31,17.42 23.77,18.96 23.77,22.22 v1(23.91,22.36)
  ART05 w0.508: v1(23.91,22.36) 23.94,22.39 23.94,22.45 25.1,23.62 25.1,27.88 26.21,28.99 26.21,37.55 v1(27.11,38.45)
  BOTTOM w0.508: C6.1 6.25,42.26 C4.1 ; v1(3.93,42.82) 3.93,42.74 v1(3.66,42.48) ; R31.2 25.92,3.67 26.37,4.12 26.51,4.12 26.52,4.13 27.1,4.13 27.7,4.72 v1(28.48,4.72)
VCC-1V8: length 1.9
  TOP w0.203: U2.19 9.85,32.1 v1(9.54,31.8)
  BOTTOM w0.203: C29.1 9.16,31.41 v1(9.54,31.8)
VCC-WIFI: length 38.6
  TOP w0.508: U5.9 22.11,2.13 22.62,1.62 23.75,1.62 24.19,1.18 25.28,1.18 26.36,2.26 27.55,2.26 27.67,2.13 v1(27.72,2.13) ; R32.1 10.25,14.27 v1(11.27,14.27)
  ART03 w0.508: v1(11.27,14.27) 11.27,13.61 13.65,11.23 13.65,7.53 12.91,6.79 v1(11.69,6.79)
  ART04 w0.508: v1(11.69,6.79) 13.35,6.79 13.86,7 17.94,7 19.47,5.47 19.47,5.43 19.97,4.94 20.8,4.94 21.05,5.19 22.69,5.19 23.52,4.36 25.44,4.36 27.66,2.13 v1(27.72,2.13)
  BOTTOM w0.508: v1(27.72,2.13) 27.12,2.13 C48.2 26.77,2.54 R31.1
VINT: length 2.8
  TOP w0.203: U2.26 13.3,33.78 v1(13.44,33.92) 13.18,34.18 U2.27
  BOTTOM w0.254: v1(13.44,33.92) 13.33,34.03 C18.1
ANT-SELET: length 22.7
  TOP w0.102: U8.5 11.98,2.44 11.89,2.35 11.87,2.35 11.78,2.26 11.78,2.25 C152.2 11.59,1.75 v1(11.66,1.68) ; v1(13.49,19.42) 13.47,19.4 13.47,18.82 13.06,18.41 U1.T5
  ART03 w0.102: v1(13.49,19.42) 13.49,17.8 13.24,17.55 13.24,16.76 13.25,16.75 13.25,16.31 12.49,15.55 12.49,12.97 14.13,11.32 14.13,7.42 12.61,5.9 v1(12.18,5.9)
  ART04 w0.102: v1(11.66,1.68) 11.72,1.68 11.89,1.86 11.89,5.49 12.09,5.69 12.09,5.81 v1(12.18,5.9)
AP-UART-CTS: length 23.1
  TOP w0.102: v1(17.06,16.95) 17.06,16.95 17.06,17.02 17.06,17.03 U1.U10 ; v1(10.79,12.07) 10.76,12.1 R45.2 ; v1(17.71,6.44) 17.49,6.66 U5.41 13.06,6.66 12.77,6.95 12.77,7.4 12.67,7.51 v1(12.67,7.52)
  ART03 w0.102: v1(17.06,16.95) 16.86,16.75 16.86,13.38 17.3,12.94 17.3,6.85 v1(17.71,6.44) ; v1(12.67,7.52) 12.67,10.39 11.26,11.79 11.07,11.79 v1(10.79,12.07)
AP-UART-RTS: length 26.5
  TOP w0.102: v1(11.23,7.19) 11.32,7.19 11.38,7.14 11.54,7.14 11.55,7.14 11.84,7.14 11.85,7.14 11.92,7.14 12.16,6.9 12.16,6.44 12.66,5.94 12.66,4.76 13.45,3.96 U5.44 15.14,3.96 16.07,4.89 v1(16.15,4.89) ; v1(15.06,18.66) 15.07,18.66 U1.R8 ; R44.2 10.33,9.97 10.78,9.52 v1(10.86,9.49)
  ART03 w0.102: v1(10.86,9.49) 11.37,9.49 11.61,9.25 11.61,7.97 11.3,7.66 11.3,7.26 v1(11.23,7.19) ; v1(15.06,18.66) 15.06,16 15.31,15.75 15.31,13.11 16.16,12.25 16.16,4.99 16.15,4.97 v1(16.15,4.89)
